# Altium PCB Board Sensor - extra.PcbDoc
Units mm, origin at the board's own origin, x right, y up, seen from the top; angles counter-clockwise.
Board outline 327 x 231 mm, 2 copper layers (Top Layer, Bottom Layer); 18 components, 0 nets, 83 pads, 0 vias.
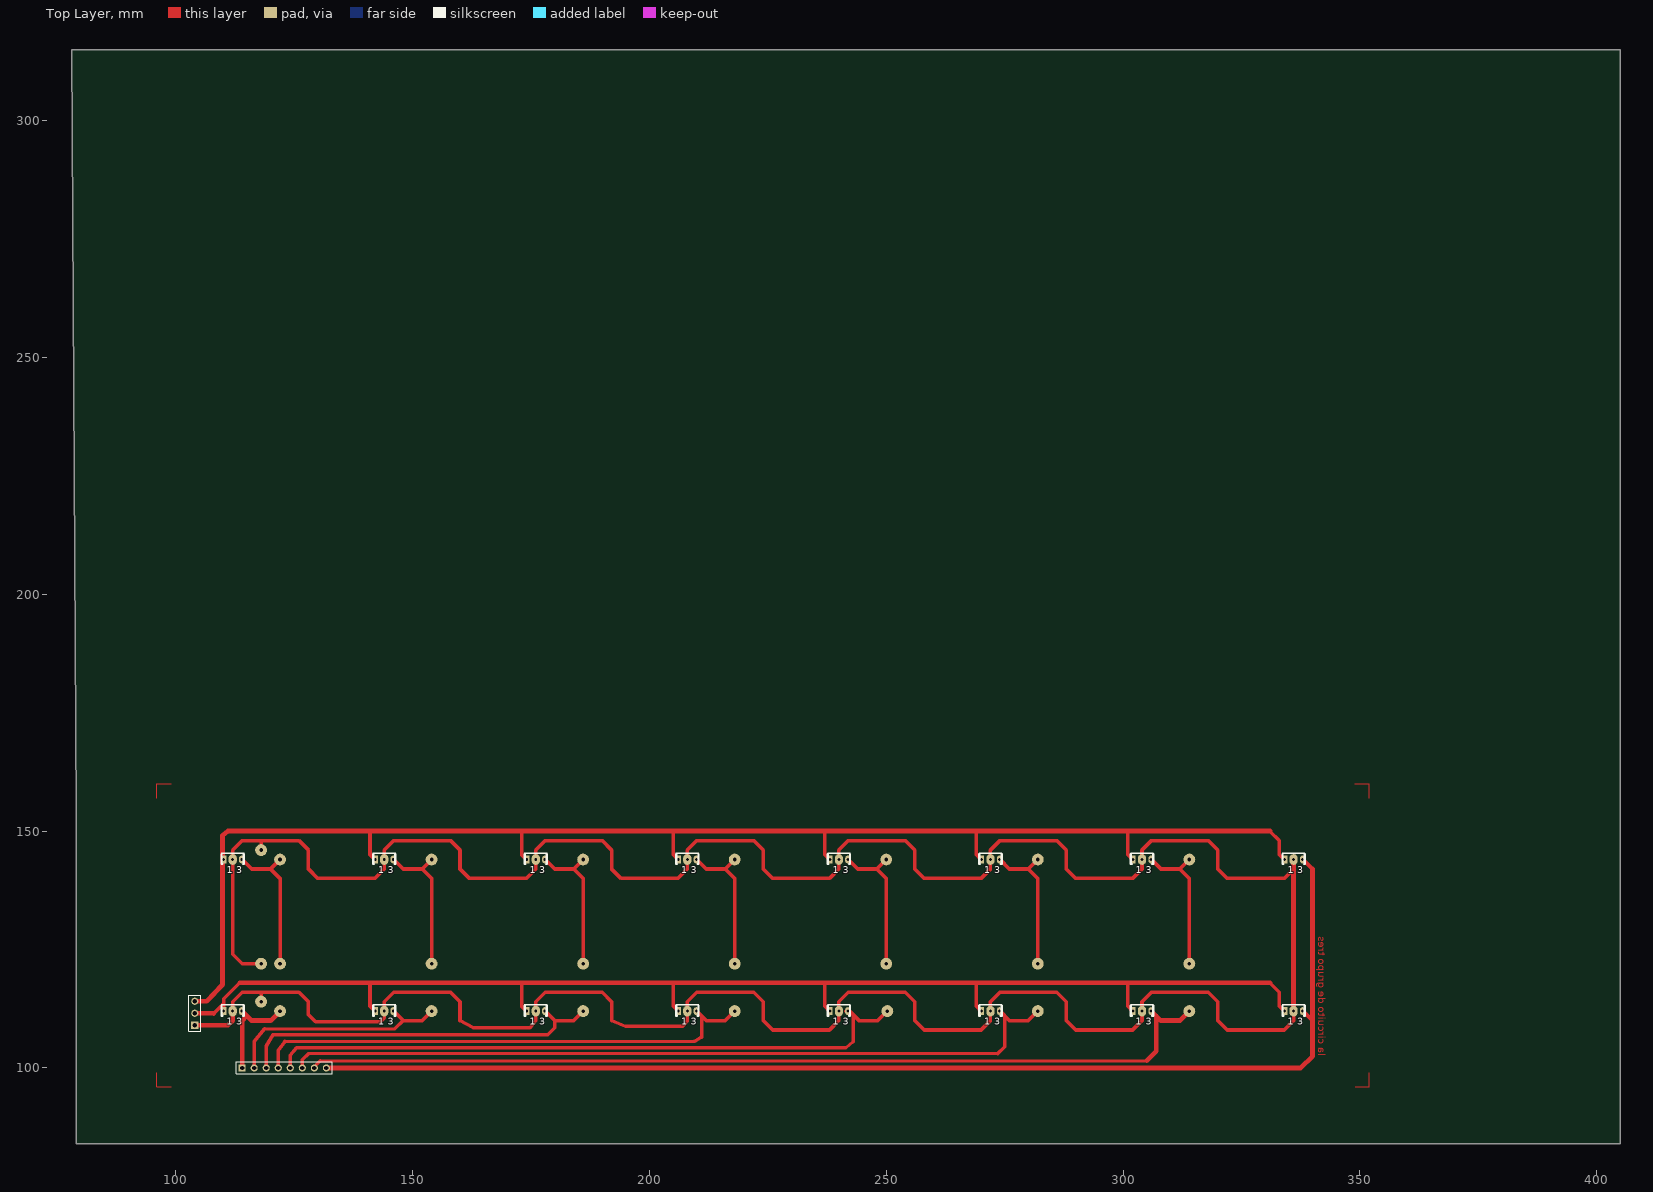
[diagram p0: Top Layer view]
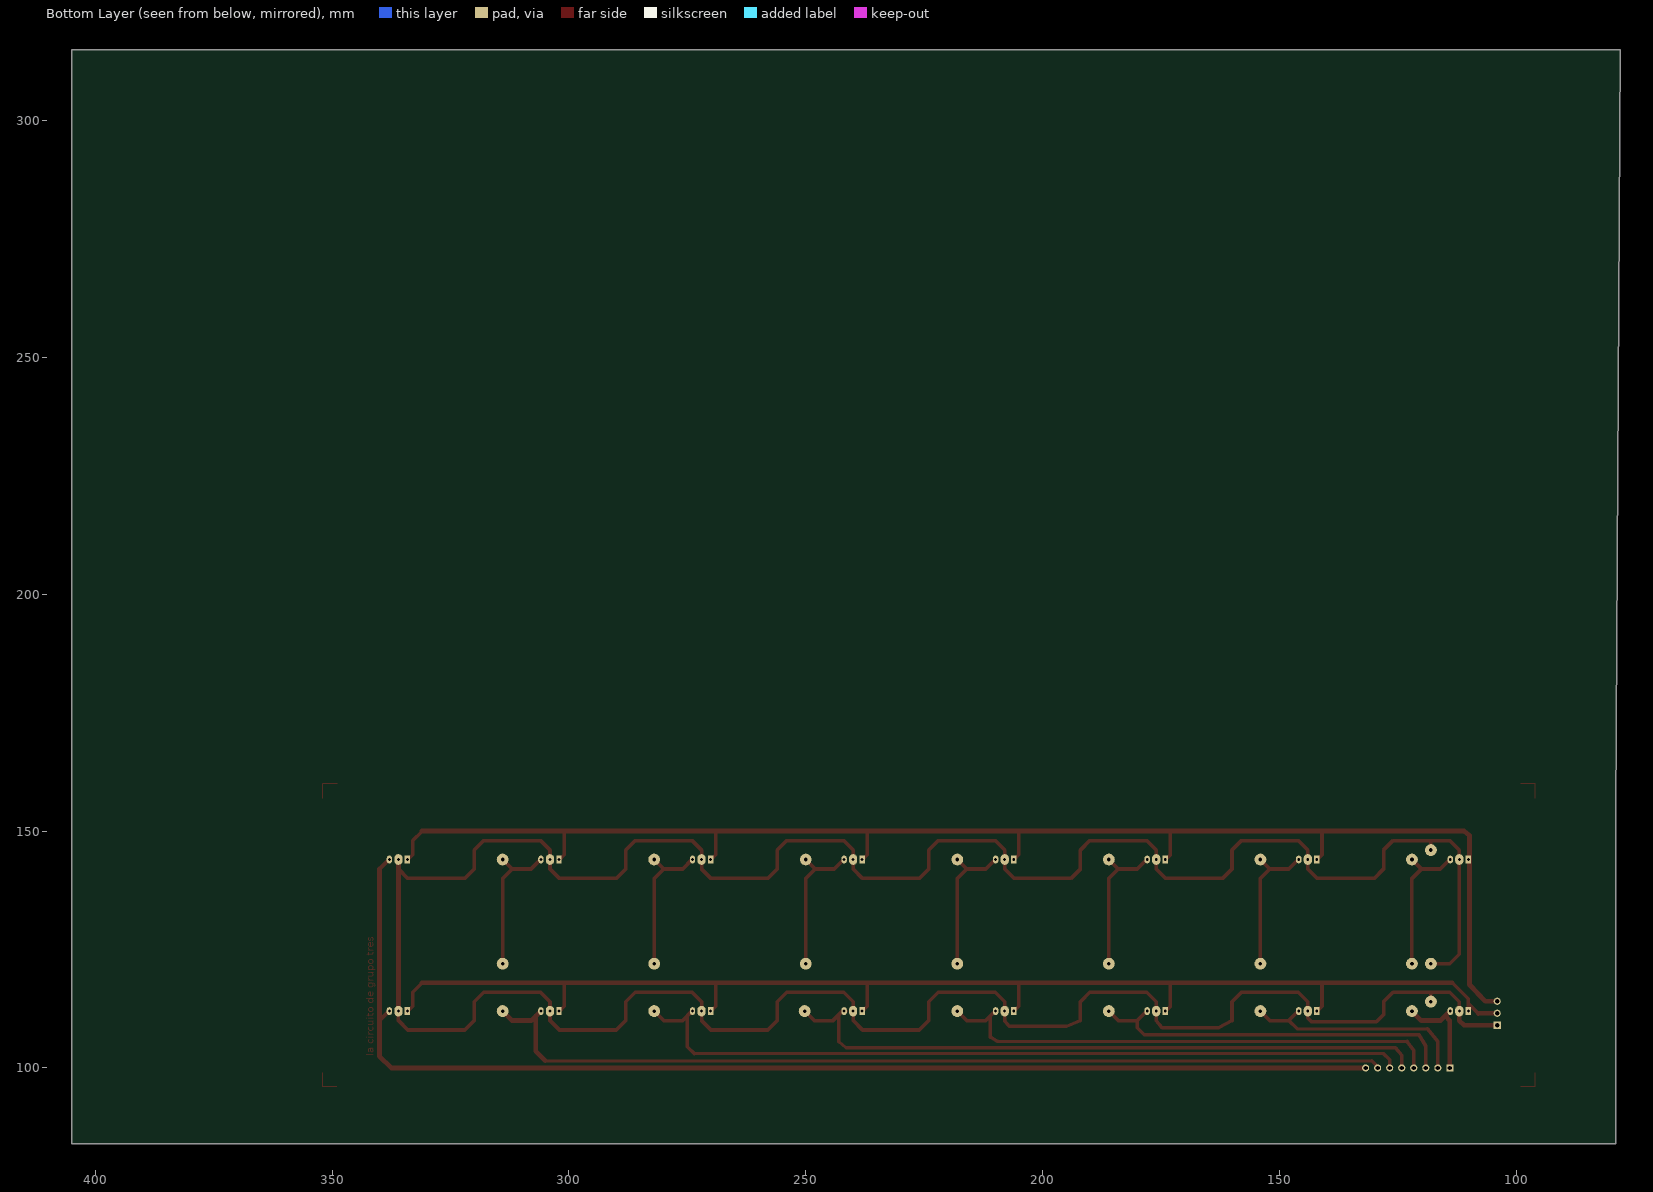
[diagram p1: Bottom Layer view, seen from below]

## Layer stack, top to bottom
Top Layer: signal copper 0.0356
Dielectric: dielectric 0.32, FR-4, Dk 4.8
Bottom Layer: signal copper 0.0356

## Board outline
78,315 405,315 405,84 79,84 79,154

## Design rules (kind name [scope] priority, off if disabled: settings)
Clearance [All] p1: gap=0.254
ComponentClearance [All] p1: gap=0.254 collisioncheckmode=0
PolygonConnect [All] p1: connectstyle=Relief reliefconductorwidth=0.254 reliefentries=4 polygonreliefangle="90 Angle"
RoutingLayers [All] p1: top layer=Horizontal bottom layer=Vertical
RoutingVias [All] p1: holewidth=0.711 width=1.27 viastyle="Through Hole" minholewidth=0.711 minwidth=1.27 maxholewidth=0.711 maxwidth=1.27
SolderMaskExpansion [All] p1: expansion=0.102
TestPointUsage [All] p1: valid=0 allowmultiple=FALSE
Testpoint [All] p1: side=15 testpointundercomponent=TRUE minsize=1.016 maxsize=2.54 preferedsize=1.524 minholesize=0 maxholesize=1.016 preferedholesize=0.813 testpointgrid=0.025 style=1023 order=-539222988
Width [All] p1: maxlimit=25 minlimit=0.25 preferedwidth=0.254 toplayer_prefwidth=0.75 bottomlayer_minwidth=0.254 bottomlayer_maxwidth=0.254 minimp=50.000000 maximp=50.000000 favimp=50.000000
16 further rules are at their usual default settings.

## Components (designator, comment, footprint, x,y, rotation, side; value= is the part's Value field where it differs from the comment)
? "" UGN-3120[2] 112,112 r0 top
? "" UGN-3120[2] 144,112 r0 top
? "" UGN-3120[2] 176,112 r0 top
? "" UGN-3120[2] 336,112 r0 top
? "" UGN-3120[2] 336,144 r0 top
? "" UGN-3120[2] 304,112 r0 top
? "" UGN-3120[2] 304,144 r0 top
? "" UGN-3120[2] 272,112 r0 top
? "" UGN-3120[2] 272,144 r0 top
? "" UGN-3120[2] 208,112 r0 top
? "" UGN-3120[2] 240,112 r0 top
? "" UGN-3120[2] 240,144 r0 top
? "" UGN-3120[2] 208,144 r0 top
? "" UGN-3120[2] 176,144 r0 top
? "" UGN-3120[2] 144,144 r0 top
? "" UGN-3120[2] 112,144 r0 top
? "" HDR1X3 104,109 r90 top
? "" HDR1X8 114,100 r0 top

## Footprints (in the part's own frame and the unit in brackets; to place one, negate y for a bottom-side part, rotate by r counter-clockwise, add the part's x,y. Pads: shape width x height; smd on the part's side, far side on the other; paste and mask are expansions set on the pad)
HDR1X3 [mm]
  rect 1.5x1.5 hole 0.9: 1(0,0)
  round 1.5 hole 0.9: 2(2.54,0) 3(5.08,0)
  silkscreen extent -1.27,-1.27 6.35,1.27
HDR1X8 [mm]
  rect 1.5x1.5 hole 0.9: 1(0,0)
  round 1.5 hole 0.9: 2(2.54,0) 3(5.08,0) 4(7.62,0) 5(10.16,0) 6(12.7,0) 7(15.24,0) 8(17.78,0)
  silkscreen extent -1.27,-1.27 19.05,1.27
UGN-3120[2] [mm]
  rect 1.15x1.65 hole 0.6: 1(-1.905,0)
  oval 1.75x2.25 hole 0.6: 2(0,0)
  oval 1.15x1.65 hole 0.6: 3(1.905,0)
  silkscreen extent -2.45,-0.95 2.45,1.53

## Free pads (board coordinates)
  round 2.5 hole 0.762: 9(118,114) 9(118,122) 9(118,146) 9(122,112) 9(122,144) 9(154,144) 9(154,112) 9(186,144) 9(186,112) 9(218,112) 9(218,144) 9(250,144) 9(250.23,112) 9(282,144) 9(282,112) 9(314,144) 9(314,112) 10(122,122) 10(154,122) 10(186,122) 10(218,122) 10(250,122) 10(282,122) 10(314,122)

## Nets (pads, with @x,y where several pads share a name; then routed paths per layer and width w, separated by ;. In a path a pad name is that pad's centre, name@x,y a point inside that pad or via, vN(x,y) a via of type N, cw(c..) or ccw(c..) an arc to the next point about the centre after c; other vN are vias at no path point)
pads on no net: ?.1 ?.2 ?.3 ?.4 ?.5 ?.6 ?.7 ?.8
copper on no net: | length 2509.6
  Top Layer w0.254: 96,99 96,96 99,96 ; 96,156.95 96,159.95 99,159.95 ; 348.95,159.95 351.95,159.95 351.95,156.95 ; 349,96 352,96 352,99
  Top Layer w0.65: 118.75,108.25 146.25,108.25 ; 120.5,107 178.5,107 ; 123,105.6 209.5,105.6 ; 125.5,104.25 241.5,104.25 243,105.5 ; 128,103 273.5,103 ; 130.5,101.5 305,101.5
  Top Layer w0.75: 108,111.5 110,113.5 ; 110.095,112 110.095,114.595 ; 110.095,114.5 110.095,114.595 ; 112,112 112,114 114,116 126,116 128,114 128,111.25 129.5,109.75 143.25,109.75 ; 113.5,118 110.095,114.595 ; 114,144 116,142 120,142 ; 116.54,100 116.54,105.54 118.75,108.25 ; 118,114 118,116 ; 118,122 114,122 112,124 112,144 112,146 114,148 126,148 128,146 128,142 130,140 142,140 144,142 144,144 144,146 146,148 158,148 160,146 160,142 162,140 174,140 176,142 176,144 176,146 178,148 190,148 192,146 192,142 194,140 206,140 208,142 208,146 210,148 222,148 224,146 224,142 226,140 238,140 240,142 240,146 242,148 254,148 256,146 256,145 256,142 258,140 270,140 272,142 272,144 272,146 274,148 286,148 288,146 288,142 290,140 302,140 304,142 304,146 306,148 318,148 320,146 320,142 322,140 334,140 336,142 ; 118,146 118,148 ; 119.08,100 119.08,104.58 120.5,107 ; 121.62,100 121.62,103.62 123,105.6 ; 122,122 122,140 120,142 ; 122,144 120,142 ; 124.16,100 124.16,102.66 125.5,104.25 ; 126.7,100 126.7,101.7 128,103 ; 129.24,100 129.24,100.24 130.5,101.5 ; 141,117.949 141,113 142,112 ; 141,149.949 141,145 142,144 ; 143.25,109.796 144,110.546 144,112 144,114 146,116 158,116 160,114 160,110 162.75,108.5 174.75,108.5 176,110 176,112 176,114 178,116 190,116 192,114 192,110 195,108.75 207,108.75 208,110 208,114 210,116 222,116 224,114 224,110 226,108 238,108 240,110 240,114 242,116 254,116 256,114 256,113 256,110 258,108 270,108 272,110 272,112 272,114 274,116 286,116 288,114 288,110 290,108 302,108 304,110 304,114 306,116 318,116 320,114 320,110 322,108 334,108 336,110 336,112 ; 146,112 148,110 ; 146,144 148,142 152,142 ; 146.25,108.25 148,110 ; 154,112 152,110 148,110 ; 154,122 154,140 152,142 ; 154,144 152,142 ; 173,118 173,113 174,112 ; 173,150 173,145 174,144 ; 177.905,112 178,112 178.911,111.089 180,110 ; 178,144 180,142 184,142 ; 178.5,107 180,108.5 180,110 ; 186,112 184,110 180,110 ; 186,122 186,140 184,142 ; 186,144 184,142 ; 205,117.949 205,113 206,112 ; 205,149.949 205,145 206,144 ; 209.5,105.6 211,106.5 211,111 210,112 212,110 216,110 218,112 ; 210,144 212,142 216,142 ; 218,122 218,140 216,142 ; 218,144 216,142 ; 237,117.949 237,113 238,112 ; 237,149.949 237,145 238,144 ; 241.5,112 242.23,112 244.23,110 248.23,110 250.23,112 ; 242,144 244,142 248,142 ; 243,105.5 243,111 ; 250,122 250,140 248,142 ; 250,144 248,142 ; 269,118 269,113 270,112 ; 269,150 269,145 270,144 ; 273.5,103 275,104.5 275,111 ; 274,112 276,110 280,110 282,112 ; 274,144 276,142 280,142 ; 282,122 282,140 280,142 ; 282,144 280,142 ; 301,118 301,113 302,112 ; 301,150 301,145 302,144 ; 306,144 308,142 312,142 ; 314,122 314,140 312,142 ; 314,144 312,142 ; 331,118 333,116 333,113 334,112 ; 331,150 333,148 333,145 334,144 ; 338,112 340,110 ; 338,144 340,142
  Top Layer w1: 104,109 111,109 112,110 112,112 ; 104,111.54 108,111.5 ; 104,114.08 106.54,114.08 109.845,117.595 109.845,149.095 111,150 331,150 ; 113.5,118 331,118 ; 114,100 114,110 115,111 ; 114,112 116,110 120,110 122,112 ; 131.78,100 337.5,100 340,102.5 340,142 ; 305,101.5 307,103.5 307,111 ; 306,112 308,110 312,110 314,112 ; 336,112 336,144

## Other copper
Top Layer:
  text "la circuito de grupo tres" at 341.25,102.5 h1.52 r270

## Text inside footprints (layer, text, board x,y; h text height)
?: Top Overlay "3" at 112.762,109.07 h1.5; Top Overlay "1" at 110.73,109.07 h1.5
?: Top Overlay "1" at 142.73,109.07 h1.5; Top Overlay "3" at 144.762,109.07 h1.5
?: Top Overlay "3" at 176.762,109.07 h1.5; Top Overlay "1" at 174.73,109.07 h1.5
?: Top Overlay "1" at 334.73,109.07 h1.5; Top Overlay "3" at 336.762,109.07 h1.5
?: Top Overlay "3" at 336.762,141.07 h1.5; Top Overlay "1" at 334.73,141.07 h1.5
?: Top Overlay "1" at 302.73,109.07 h1.5; Top Overlay "3" at 304.762,109.07 h1.5
?: Top Overlay "3" at 304.762,141.07 h1.5; Top Overlay "1" at 302.73,141.07 h1.5
?: Top Overlay "1" at 270.73,109.07 h1.5; Top Overlay "3" at 272.762,109.07 h1.5
?: Top Overlay "3" at 272.762,141.07 h1.5; Top Overlay "1" at 270.73,141.07 h1.5
?: Top Overlay "1" at 206.73,109.07 h1.5; Top Overlay "3" at 208.762,109.07 h1.5
?: Top Overlay "3" at 240.762,109.07 h1.5; Top Overlay "1" at 238.73,109.07 h1.5
?: Top Overlay "1" at 238.73,141.07 h1.5; Top Overlay "3" at 240.762,141.07 h1.5
?: Top Overlay "3" at 208.762,141.07 h1.5; Top Overlay "1" at 206.73,141.07 h1.5
?: Top Overlay "1" at 174.73,141.07 h1.5; Top Overlay "3" at 176.762,141.07 h1.5
?: Top Overlay "3" at 144.762,141.07 h1.5; Top Overlay "1" at 142.73,141.07 h1.5
?: Top Overlay "1" at 110.73,141.07 h1.5; Top Overlay "3" at 112.762,141.07 h1.5